# Altium PCB PCB1.PcbDoc
Units mm, origin at the board's own origin, x right, y up, seen from the top; angles counter-clockwise.
Board outline 58 x 72 mm, 2 copper layers (Top Layer, Bottom Layer); 27 components, 29 nets, 134 pads, 22 vias.
Unrouted connection lines stored in the file: 4.
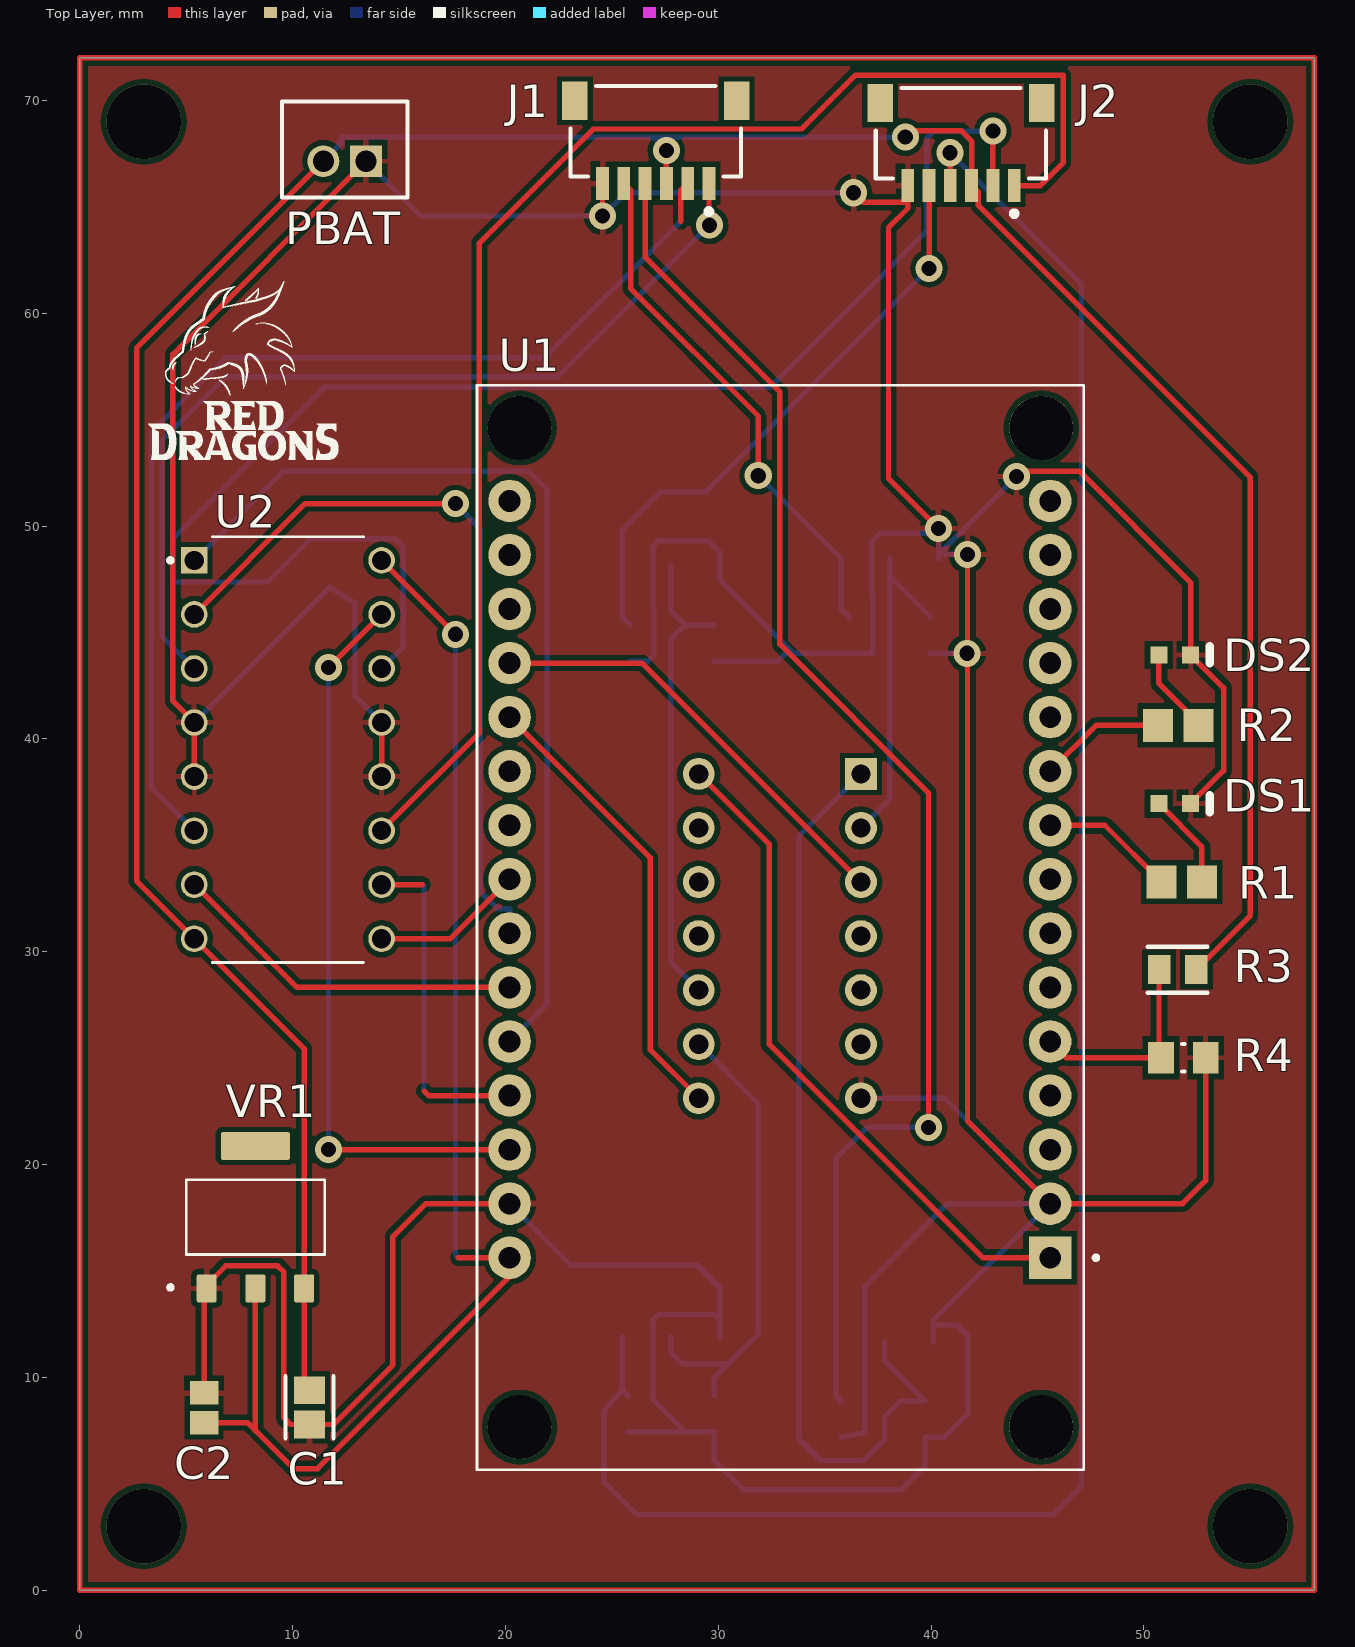
[diagram p0: Top Layer view]
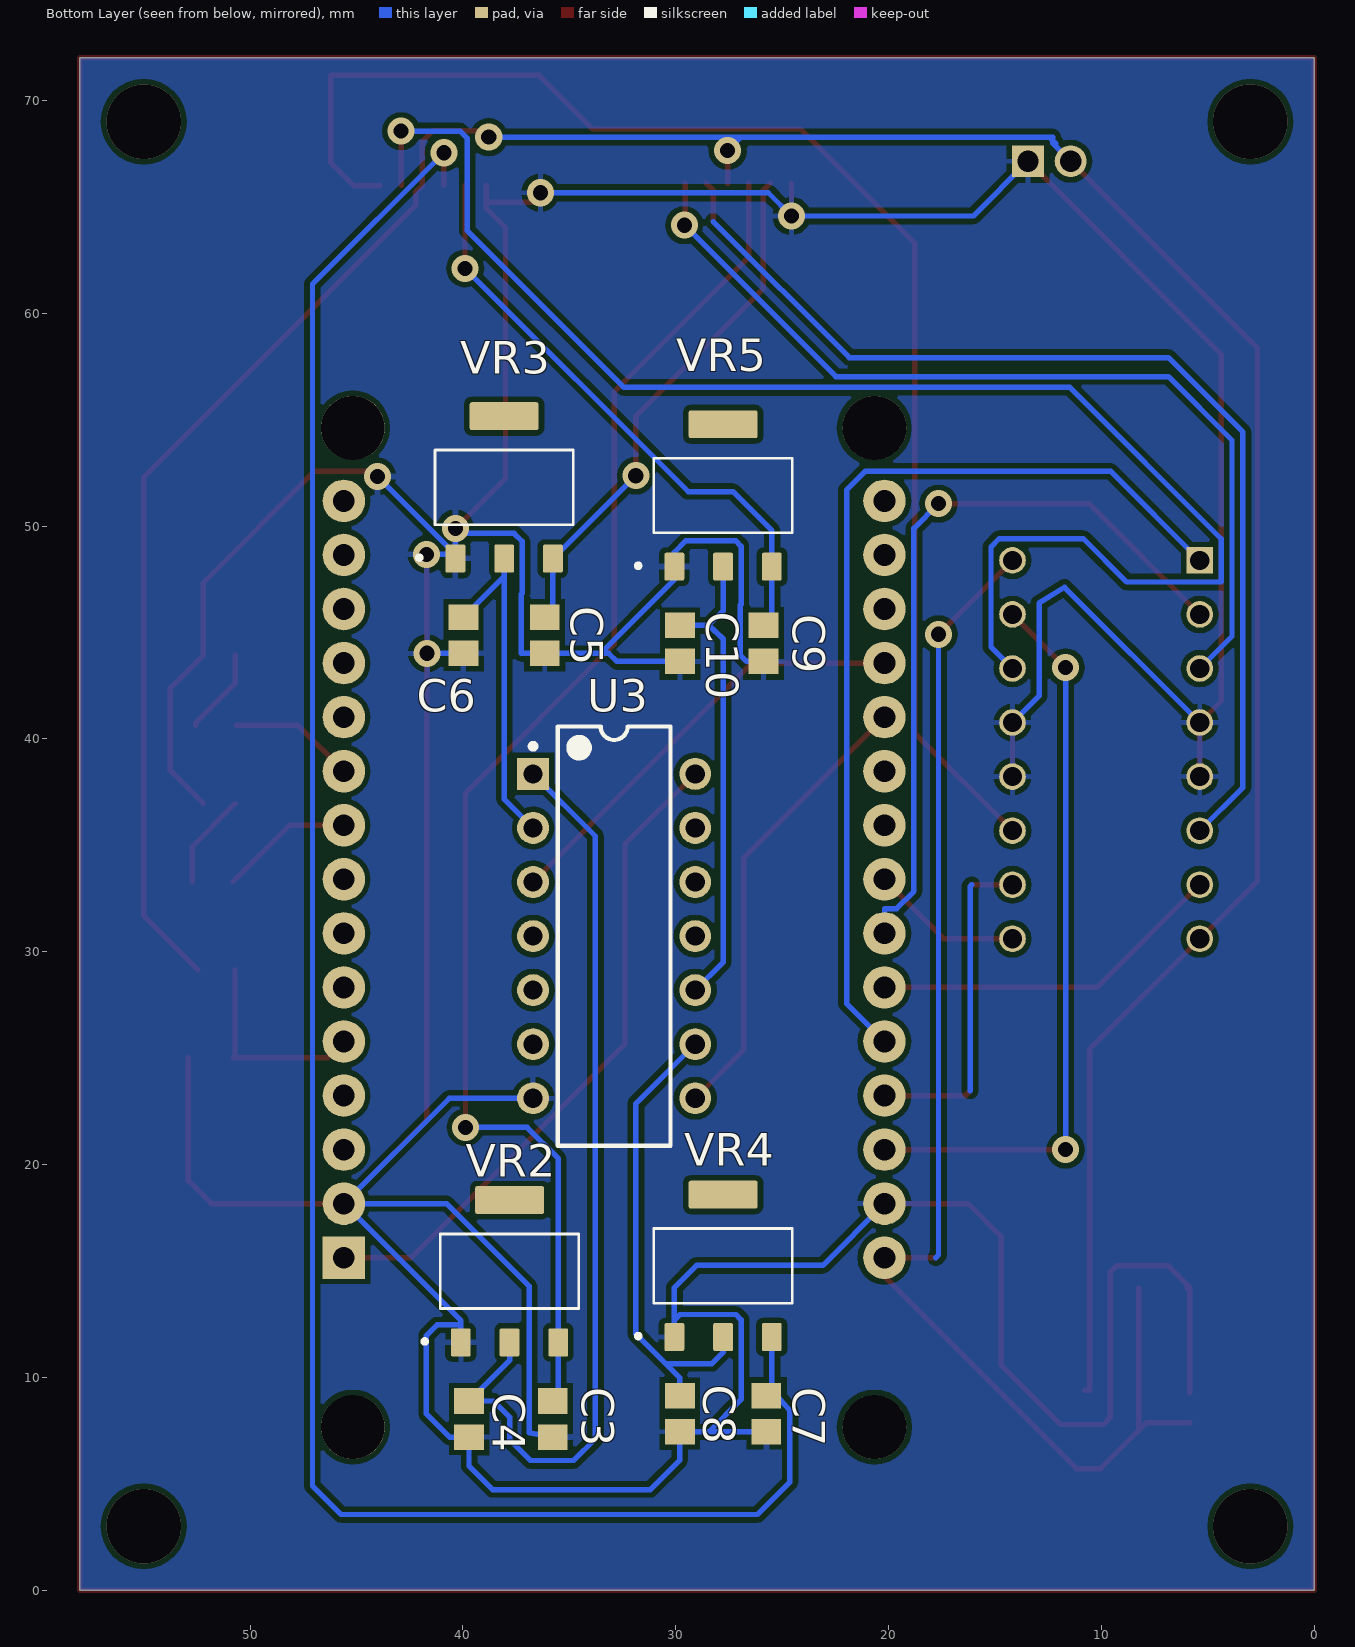
[diagram p1: Bottom Layer view, seen from below]
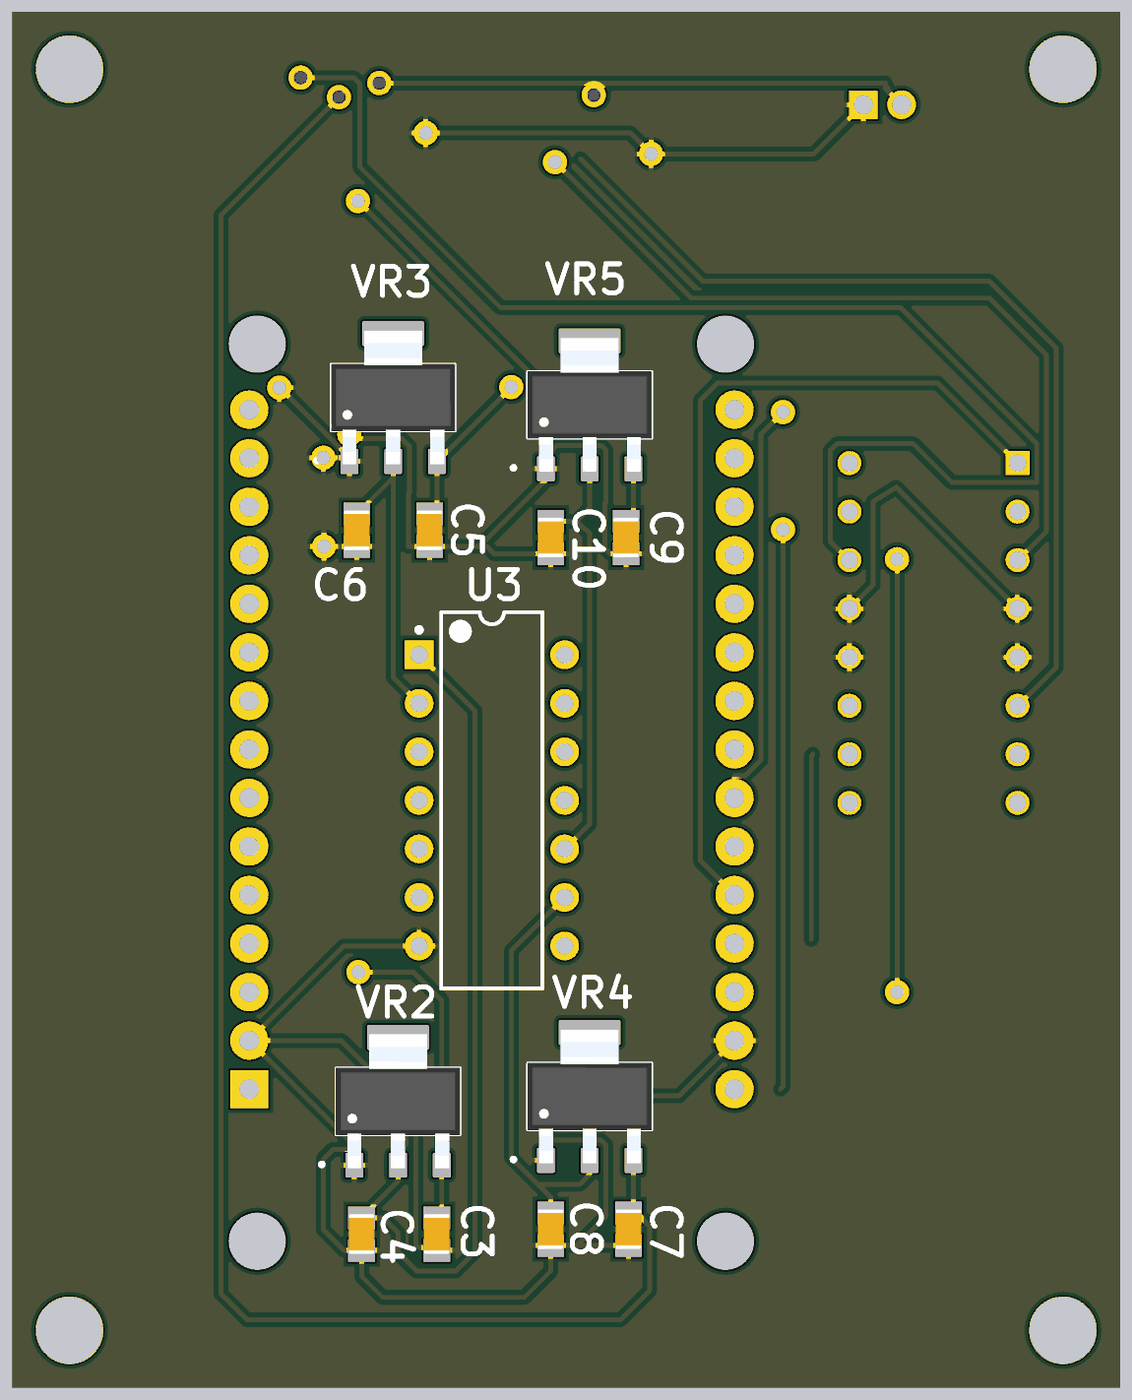
[diagram p2: 3D render of the assembled board from below, using the file's embedded part models]

## Layer stack, top to bottom
Top Solder: solder mask 0.0102, Solder Resist, Dk 3.5
Top Layer: signal copper 0.0356
Dielectric 1: dielectric 0.32, FR-4, Dk 4.8
Bottom Layer: signal copper 0.0356
Bottom Solder: solder mask 0.0102, Solder Resist, Dk 3.5

## Board outline
0,0 0,72 58,72 58,0

## Design rules (kind name [scope] priority, off if disabled: settings)
Clearance [All] p1: gap=0.254 ignorepadtopadclearanceinfootprint=FALSE except(0: Arc-Hole Track-Hole SMDPad-Hole THPad-Hole Via-Hole Fill-Hole Poly-Hole Region-Hole Text-Hole)
PolygonConnect [All] p1: connectstyle=Relief reliefconductorwidth=0.254 reliefentries=4 polygonreliefangle="90 Angle" airgapwidth=0.254
RoomDefinition Energia [InComponentClass('Energia')] p1: confinementstyle=ConfineIn formatcopy=TRUE lockcomponents=FALSE outline 69.596,0.172 127.596,0.172 127.596,72.054 69.596,72.054
RoutingVias [All] p1: holewidth=0.711 width=1.27 viastyle="Through Hole" minholewidth=0.711 minwidth=1.27 maxholewidth=0.711 maxwidth=1.27
SolderMaskExpansion [All] p1: expansion=0.102 istentingtop=FALSE
Width [All] p1: maxlimit=0.254 minlimit=0.254 preferedwidth=0.254
30 further rules are at their usual default settings.

## Components (designator, comment, footprint, x,y, rotation, side; value= is the part's Value field where it differs from the comment)
C1 "330nF" FP-0805-L_2_01_0_2-W_1_25-IPC_B 10.795,8.592 r270 top
C2 "100nF" CAPC2013X140X50LL20T25 5.842,8.571 r270 top
C3 "Capacitor 10 uF +/- 10% 16 V 0805" CAPC2013X135X45NL10T25 35.775,8.04 r270 bottom value=10µF
C4 "Capacitor 10 uF +/- 10% 16 V 0805" CAPC2013X135X45NL10T25 39.712,8.04 r270 bottom value=10µF
C5 "Capacitor 10 uF +/- 10% 16 V 0805" CAPC2013X135X45NL10T25 36.156,44.87 r270 bottom value=10µF
C6 "Capacitor 10 uF +/- 10% 16 V 0805" CAPC2013X135X45NL10T25 39.966,44.87 r270 bottom value=10µF
C7 "Capacitor 10 uF +/- 10% 16 V 0805" CAPC2013X135X45NL10T25 25.742,8.294 r270 bottom value=10µF
C8 "Capacitor 10 uF +/- 10% 16 V 0805" CAPC2013X135X45NL10T25 29.806,8.294 r270 bottom value=10µF
C9 "Capacitor 10 uF +/- 10% 16 V 0805" CAPC2013X135X45NL10T25 25.869,44.489 r270 bottom value=10µF
C10 "Capacitor 10 uF +/- 10% 16 V 0805" CAPC2013X135X45NL10T25 29.806,44.489 r270 bottom value=10µF
DS1 "LTST-C190KFKT" LTST-C190KFKT_V 51.447,36.957 r0 top
DS2 "LTST-C190KFKT" LTST-C190KFKT_V 51.447,43.942 r0 top
J1 "JST-SH-6Pin" JST-SM06B-SRSS-TB_V 27.061,68.552 r180 top
J2 "JST-SH-6Pin" JST-SM06B-SRSS-TB_V 41.402,68.453 r180 top
PBAT "JST PH 2-PIN" JST-B2B-PH-K-S_V 12.446,67.691 r180 top
R1 "ERA6AEB101V" RESC2013X60X40ML20T25 51.774,33.274 r180 top
R2 "ERA6AEB101V" RESC2013X60X40ML20T25 51.608,40.635 r180 top
R3 "22k" FP-CR0805-IPC_B 51.585,29.155 r0 top
R4 "Resistor 10k +/-1% 0805 125 mW" RESC2013X50X35ML15T15 51.85,25.019 r180 top value=10k
U1 "ESP32-DEVKIT-V1" MODULE_ESP32_DEVKIT_V1 32.893,31.136 r180 top
U2 "L293D" DIP880W50P254L2000H510Q16 9.779,39.497 r0 top
U3 "SN74HC86N" N0014A 32.893,30.734 r180 bottom
VR1 "AMS1117-5.0" SOT229P700X180-4N 8.25,17.526 r0 top
VR2 "AMS1117-3.3" SOT229P700X180-4N 37.807,14.986 r180 bottom
VR3 "AMS1117-3.3" SOT229P700X180-4N 38.061,51.816 r180 bottom
VR4 "AMS1117-3.3" SOT229P700X180-4N 27.774,15.24 r180 bottom
VR5 "AMS1117-3.3" SOT229P700X180-4N 27.774,51.435 r180 bottom

## Footprints (in the part's own frame and the unit in brackets; to place one, negate y for a bottom-side part, rotate by r counter-clockwise, add the part's x,y. Pads: shape width x height; smd on the part's side, far side on the other; paste and mask are expansions set on the pad)
CAPC2013X135X45NL10T25 [mm] "Chip Capacitor, 2-Leads, Body 2.10x1.35mm, IPC Medium Density"
  rect 1.2x1.4 smd: 1(-0.85,0) 2(0.85,0)
  body extent -1.05,-0.67 1.05,0.67, height 1.35
CAPC2013X140X50LL20T25 [mm] "Chip Capacitor, 2-Leads, Body 2.00x1.25mm, IPC High Density"
  rect 1.1x1.35 smd: 1(-0.7,0) 2(0.7,0)
  body extent -1.1,-0.72 1.1,0.72, height 1.4
DIP880W50P254L2000H510Q16 [mm]
  rect 1.25x1.25 hole 0.9: 1(-4.4,8.89)
  round 1.25 hole 0.9: 2(-4.4,6.35) 3(-4.4,3.81) 4(-4.4,1.27) 5(-4.4,-1.27) 6(-4.4,-3.81) 7(-4.4,-6.35) 8(-4.4,-8.89) 9(4.4,-8.89) 10(4.4,-6.35) 11(4.4,-3.81) 12(4.4,-1.27) 13(4.4,1.27) 14(4.4,3.81) 15(4.4,6.35) 16(4.4,8.89)
  silkscreen extent -5.62,-10 3.55,10
FP-0805-L_2_01_0_2-W_1_25-IPC_B [mm]
  rect 1.305x1.456 smd paste+0 mask+0: 1(-0.806,0) 2(0.806,0)
  silkscreen extent -1.46,-1.13 1.46,1.13, body extent -1,-0.63 1,0.63, height 1.4
FP-CR0805-IPC_B [mm]
  rect 1.058x1.362 smd paste+0 mask+0: 1(-0.877,0) 2(0.877,0)
  silkscreen extent -1.41,-1.08 1.41,1.08, body extent -1.66,-0.93 1.66,0.93, height 0.25
JST-B2B-PH-K-S_V [mm] "Connector, 2-Leads, Body 5.9x4.5mm, Pitch 2mm"
  rect 1.5x1.5 hole 1: 1(-1,0.55)
  round 1.5 hole 1: 2(1,0.55)
  silkscreen extent -2.95,-2.25 2.95,2.25, body extent -2.95,-2.25 2.95,2.25, height 6
JST-SM06B-SRSS-TB_V [mm] "SMD, 6-Leads, Body 8x4.25mm, Pitch 1mm"
  rect 0.6x1.55 smd: 1(-2.5,2.45) 2(-1.5,2.45) 3(-0.5,2.45) 4(0.5,2.45) 5(1.5,2.45) 6(2.5,2.45)
  rect 1.2x1.8 smd: MP1(-3.8,-1.425) MP2(3.8,-1.425)
  silkscreen extent -4,-2.13 4,3.9, body extent -4,-2.12 4,2.83, height 2.96
LTST-C190KFKT_V [mm] "SMD, 2-Leads, Body 1.6x0.8mm"
  rect 0.8x0.8 smd: 1(-0.75,0) 2(0.75,0)
  silkscreen extent 1.65,-0.4 1.65,0.4, body extent -0.8,-0.4 0.8,0.4, height 0.9
MODULE_ESP32_DEVKIT_V1 [mm]
  rect 2x2 hole 1.02: 1(-12.7,15.515)
  round 2 hole 1.02: 2(-12.7,12.975) 3(-12.7,10.435) 4(-12.7,7.895) 5(-12.7,5.355) 6(-12.7,2.815) 7(-12.7,0.275) 8(-12.7,-2.265) 9(-12.7,-4.805) 10(-12.7,-7.345) 11(-12.7,-9.885) 12(-12.7,-12.425) 13(-12.7,-14.965) 14(-12.7,-17.505) 15(-12.7,-20.045) 16(12.7,-20.045) 17(12.7,-17.505) 18(12.7,-14.965) 19(12.7,-12.425) 20(12.7,-9.885) 21(12.7,-7.345) 22(12.7,-4.805) 23(12.7,-2.265) 24(12.7,0.275) 25(12.7,2.815) 26(12.7,5.355) 27(12.7,7.895) 28(12.7,10.435) 29(12.7,12.975) 30(12.7,15.515)
  round 3 hole 3 unplated: ""(-12.28,23.475) ""(-12.28,-23.475) ""(12.23,23.475) ""(12.23,-23.475)
  silkscreen extent -14.95,-25.48 14.23,25.48
N0014A [mm] "DIP, 14-Leads, Body 19.7x6.6mm, Pitch 2.54mm"
  rect 1.5x1.5 hole 0.9: 1(-3.81,7.62)
  round 1.5 hole 0.9: 2(-3.81,5.08) 3(-3.81,2.54) 4(-3.81,0) 5(-3.81,-2.54) 6(-3.81,-5.08) 7(-3.81,-7.62) 8(3.81,-7.62) 9(3.81,-5.08) 10(3.81,-2.54) 11(3.81,0) 12(3.81,2.54) 13(3.81,5.08) 14(3.81,7.62)
  silkscreen extent -3.94,-9.85 2.65,9.85, body extent -3.95,-9.85 3.95,9.85, height 5.08
RESC2013X50X35ML15T15 [mm] "Chip Resistor, 2-Leads, Body 2.2x1.4mm, IPC Low Density"
  rect 1.2x1.5 smd: 1(-1.05,0) 2(1.05,0)
  silkscreen extent -0.05,-0.65 0.05,0.65, body extent -1.1,-0.7 1.1,0.7, height 0.5
RESC2013X60X40ML20T25 [mm] "Chip Resistor, 2-Leads, Body 2.00x1.25mm, IPC Low Density"
  rect 1.4x1.55 smd: 1(-0.95,0) 2(0.95,0)
  body extent -1.1,-0.72 1.1,0.72, height 0.6
SOT229P700X180-4N [mm]
  rrect15% 0.93x1.31 smd: 1(-2.29,-3.345) 2(0,-3.345) 3(2.29,-3.345)
  rrect15% 3.24x1.31 smd: 4(0,3.345)
  silkscreen extent -4.09,-3.4 3.25,1.75, body extent -3.25,-3.5 3.25,3.5, height 1.8

## Part data
C1: library part CMP-2007-04657-2, "General Purpose Ceramic Capacitor, 0805, 330nF, 10%, X7R, 15%, 16V", Case Code (Imperial)=0805, Case Code (Metric)=2012, Dielectric=X7R, Insulation Resistance=100GR, Max Operating Temperature=125°C, Min Operating Temperature=-55°C, Package Quantity=1, Tolerance=10%, Voltage=16V, Capacitance=330nF, Case/Package=0805, Construction=Flat, Contact Plating=Tin, Depth=1.25mm, Dissipation Factor=3.5%, Height=1.4mm, Lead Free="Lead Free", Length=2.01mm, Mount="Surface Mount", Number of Pins=2, Packaging="Tape and Reel", Radiation Hardening=No, REACH SVHC="No SVHC", RoHS Compliant=Yes, Series=-, Size=1.4mm, Termination=SMD/SMT, Thickness=0.055inch, Voltage Rating=16V, Voltage Rating (DC)=16V, Width=1.25mm
C2: library part CMP-2007-04746-1, Manufacturer="AVX Interconnect / Elco", Part Number=08055C104K4T4A
C3 C4 C5 C6 C7 C8 C9 C10: library part CMP-001-00015-6, "Chip Capacitor, 10 uF, +/- 10%, 16 V, 0805 (2012 Metric)", Capacitor Type=Ceramic, Case/Package=0805, Max Operating Temperature=85°C, Min Operating Temperature=-55°C, Tolerance=10%, Voltage Rating=16V, Mounting Technology=SM, Pins=2, RoHS Compliant=True
DS1 DS2: library part CMP-007-00023-2, "LED Uni-Color Orange, 75 mW, 30 mA, -35 to 85 degC, 2-Pin SMD, RoHS, Tape and Reel", Case/Package=0603, Colour=Orange, Forward Current=20mA, Forward Voltage=2V, Manufacturer=Lite-On, Max Operating Temperature=85°C, Min Operating Temperature=-55°C, Package Description="2-Pin Surface Mount Device, Body 1.6 x 0.8 mm", Package Quantity=3000, Package Reference=C190KFKT, Power=75mW, Datasheet URL=http://optoelectronics.liteon.com/upload/download/DS-22-99-0186/S_110_LTST-C190KFKT.pdf, Datasheet Version="Rev. I, 09/2011", Illumination Colour=Orange, Lens Style=Diffused, Luminous Intensity=90mcd, Manufacturer URL=http://www.us.liteon.com/, Mounting Technology=SM, Nominal Vf=2V, Packaging=TapeandReel, Pins=2, RoHS Compliant=True, Viewing Angle=130degrees
J1 J2: library part CMP-2000-07080-1, "Male Header, Pitch 1 mm, 1 x 6 Position, Height 2.95 mm, -25 to 85 degC, RoHS, Tape and Reel", Manufacturer=JST, Package Description="Male Header, Pitch 1 mm, 1 X 6 Position, Height 2.9 mm", Package Reference=SM06B-SRSS-TB, Datasheet URL=https://datasheet.ciiva.com/26894/getdatasheetpartid-708885-26894671.pdf, Datasheet Version=11/2010, Manufacturer URL=http://www.jst.com/home2.html, Mounting Technology=SurfaceMount, No of Positions=6, Pitch=1mm, Style/Orientation=RightAngleHeader/Plug, Termination=Solder, Type=ShroudedHeader
PBAT: library part CMP-2000-05162-1, "Male Header, Pitch 2 mm, 1 x 2 Position, Height 6 mm, Tail Length 3.4 mm, -25 to 85 degC, RoHS, Bulk", Manufacturer=JST, Datasheet URL=http://datasheet.octopart.com/B2B-PH-K-S%28LF%29%28SN%29-JST-datasheet-8324864.pdf, Datasheet Version=Nov-08, Manufacturer URL=http://www.jst.com/home2.html, No of Positions=2, Pitch=2mm, Style/Orientation=StraightHeader/Plug, Termination=Crimp, Type=ShroudedHeader
R1 R2: library part CMP-2001-00580-1, Manufacturer=Panasonic, Part Number=ERA6AEB101V
R3: library part CMP-07231-001007-1, "Thick Film Chip Resistors 0805 22kΩ 0.125W 5% 200ppm/°C", Case Code (Imperial)=0805, Case Code (Metric)=2012, Max Operating Temperature=155°C, Min Operating Temperature=-55°C, Package Quantity=5000, Power Rating=125mW, Resistance=22kR, Temperature Coefficient=200ppm/°C, Tolerance=5%, Voltage Rating=150V, Case/Package=0805, Composition="Thick Film", Contact Plating=Tin, Depth=1.25mm, Height=0.5mm, Length=2mm, Military Standard=Not, Mount="Surface Mount", Packaging="Tape and Reel", Radiation Hardening=No, Termination=SMD/SMT, Thickness=508um, Width=1.25mm
R4: library part CMP-009-00018-5, "Chip Resistor, 10 KOhm, +/- 1%, 125 mW, -55 to 155 degC, 0805 (2012 Metric)", Case/Package=0805, Max Operating Temperature=155°C, Min Operating Temperature=-55°C, Power=125mW, Tolerance=1%, Voltage Rating=150V, Mounting Technology=SM, Pins=2, RoHS Compliant=True
U1: "Dual core, Wi-Fi: 2.4 GHz up to 150 Mbits/s,BLE (Bluetooth Low Energy) and legacy Bluetooth, 32 bits, Up to 240 MHz", Package=None, Availability=Unavailable, MF="{'manufacturer': u'Do it'}", MP=ESP32-DEVKIT-V1, Price=None
U2: "4-Channel Motor Driver 24V 16-Pin Power PDIP Tube", Package=None, Availability=Unavailable, MF="{'manufacturer': u'STMicroelectronics'}", MP=L293D, Price=None
U3: library part CMP-024-00000-1, "4-ch, 2-input, 2-V to 6-V XOR (exclusive OR) gates 14-PDIP -40 to 85"
VR1: Package=None, Availability=Unavailable, MF="{'manufacturer': u'ams'}", MP=AMS1117-5.0, Price=None
VR2 VR3 VR4 VR5: "Sot223/Pkg 1-Amp 3.3-Volt Low Drop Out Voltage Regulatator", Package=None, Availability=Unavailable, MF="{'manufacturer': u'Advanced Monolithic Systems'}", MP=AMS1117-3.3, Price=None

## Via types
v1: diameter 1.27, hole 0.711, Top Layer to Bottom Layer, 18 vias
v2: diameter 3.5/3.5 (per signal layer), hole 3.5, Top Layer to Bottom Layer, 4 vias

## Nets (pads, with @x,y where several pads share a name; then routed paths per layer and width w, separated by ;. In a path a pad name is that pad's centre, name@x,y a point inside that pad or via, vN(x,y) a via of type N, cw(c..) or ccw(c..) an arc to the next point about the centre after c; other vN are vias at no path point)
+3V: U1.1 U3.14 | length 31.4
  Top Layer w0.254: U3.14 32.385,35.052 32.385,25.654 42.418,15.621 U1.1
+3V3A1: C4.1 U3.1 VR2.2 | length 44.1
  Bottom Layer w0.254: U3.1 33.782,35.433 33.782,7.112 34.798,6.096 36.83,6.096 37.807,7.073 37.807,8.128 38.569,8.89 C4.1 37.807,10.795 VR2.2
+3V3A2: C8.1 U3.9 VR4.2 | length 22.2
  Bottom Layer w0.254: VR4.2 27.774,11.176 28.302,10.649 30.48,10.649 ; U3.9 31.877,22.86 31.877,12.046 30.48,10.649 ; C8.1 29.806,9.975 30.48,10.649
+3V3B1: C6.1 U3.2 VR3.2 | length 15.9
  Bottom Layer w0.254: U3.2 38.061,37.172 38.061,47.625 ; VR3.2 38.061,47.625 ; C6.1 38.061,47.625
+3V3B2: C10.1 U3.10 VR5.2 | length 22.4
  Bottom Layer w0.254: VR5.2 27.774,46.013 28.448,45.339 ; U3.10 27.774,29.503 27.774,44.704 28.448,45.339 ; C10.1 28.448,45.339
+5V: C2.2 U1.30 U2.16 VR1.2 | length 63.2
  Top Layer w0.254: C2.2 7.877,7.871 8.25,7.498 ; VR1.2 8.25,7.498 ; U2.16 v1(17.653,44.913) ; 17.78,15.621 U1.30 20.193,14.732 11.176,5.715 10.033,5.715 8.25,7.498
  Bottom Layer w0.254: v1(17.653,44.913) 17.653,15.748 17.78,15.621
EN1: U1.26 U2.1 | length 45.3
  Bottom Layer w0.254: U2.1 9.57,52.578 21.082,52.578 21.971,51.689 21.971,27.559 U1.26
EN2: U1.23 U2.9 | length 7.2
  Top Layer w0.254: U2.9 17.399,30.607 U1.23
GND: C1.2 C2.1 C3.2 C4.2 C5.2 C6.2 C7.2 C8.2 C9.2 C10.2 DS1.2 DS2.2 J1.6 J2.6 PBAT.1 R4.1 U1.2 U1.29 U2.4 U2.5 U2.12 U2.13 U3.7 VR1.1 VR2.1 VR3.1 VR4.1 VR5.1 | length 329.7
  Top Layer w0.254: U2.5 U2.4 4.369,41.777 4.369,58.064 PBAT.1 ; C2.1 5.842,14.181 5.842,14.224 VR1.1@5.879,14.261 ; VR1.1 VR1.1@5.879,14.261 ; U2.12 U2.13 ; U1.29 16.256,18.161 14.707,16.612 14.707,10.58 11.913,7.786 C1.2 9.906,7.786 9.587,8.105 9.587,14.949 9.296,15.24 6.858,15.24 VR1.1@5.879,14.261 ; v1(24.561,64.567) J1.6 ; v1(36.355,65.659) 36.801,65.214 38.902,65.214 ; J2.6 38.902,65.214 ; v1(40.351,49.888) 37.998,52.241 37.998,64.016 38.902,64.92 38.902,65.214 ; v1(41.681,44.02) v1@41.707,44.02 ; v1(41.707,48.666) v1@41.707,44.02 ; v1(44.018,52.333) 44.263,52.578 46.965,52.578 52.197,47.346 DS2.2 53.746,42.393 53.746,38.506 DS1.2 ; R4.1 52.9,19.245 51.816,18.161 U1.2 41.707,22.047 v1@41.707,44.02
  Bottom Layer w0.254: U2.4 11.729,47.117 12.929,46.38 12.929,42.017 U2.13 ; PBAT.1 16.02,64.567 v1(24.561,64.567) 25.653,65.659 v1(36.355,65.659) ; U1.29 23.089,15.265 29.023,15.265 30.064,14.224 30.064,12.7 ; C7.2 28.448,7.444 ; C9.2 26.672,43.639 26.975,43.942 26.975,46.279 26.924,46.33 26.924,49.047 27.178,49.301 29.531,49.301 30.064,48.768 VR5.1 30.064,47.484 33.528,44.02 ; C10.2 32.766,43.639 33.147,44.02 33.528,44.02 ; VR4.1 30.064,12.7 ; C3.2 36.881,7.393 36.881,14.275 40.767,18.161 U1.2 ; U3.7 40.64,23.114 U1.2 ; C6.2 v1(41.681,44.02) ; VR2.1 40.097,12.469 ; VR3.1 VR3.1@40.351,48.666 ; v1(40.351,49.888) v1@40.351,49.276 ; v1(41.707,48.666) VR3.1@40.351,48.666 ; v1(44.018,52.333) VR3.1@40.351,48.666 ; 28.448,7.444 C8.2 29.806,6.109 31.191,4.724 38.608,4.724 39.712,5.829 C4.2 40.627,7.19 41.718,8.28 41.718,11.969 41.217,12.469 40.097,12.469 ; 28.448,7.444 26.924,8.968 26.924,12.7 27.178,12.954 29.81,12.954 30.064,12.7 ; 33.528,44.02 C5.2 37.262,44.02 37.262,46.787 37.211,46.838 37.211,49.276 37.592,49.657 39.97,49.657 v1@40.351,49.276 ; 40.097,12.469 40.097,12.665 U1.2 ; VR3.1@40.351,48.666 v1@40.351,49.276
IN1: U1.24 U2.2 | length 36
  Top Layer w0.254: U2.2 10.586,51.054 v1(17.653,51.054)
  Bottom Layer w0.254: v1(17.653,51.054) 18.812,49.895 18.812,32.829 19.621,32.02 20.193,32.02 U1.24
IN2: U1.25 U2.7 | length 16.8
  Top Layer w0.254: U2.7 10.205,28.321 U1.25
IN3: U1.27 U2.10 | length 15.8
  Top Layer w0.254: U2.10 16.093,33.147 ; 16.17,23.454 16.383,23.241 U1.27
  Bottom Layer w0.254: 16.093,33.147 16.17,33.07 16.17,23.454
IN4: U1.28 U2.15 | length 34.7
  Top Layer w0.254: v1(11.684,20.701) U1.28 ; v1(11.684,43.352) U2.15
  Bottom Layer w0.254: v1(11.684,20.701) v1(11.684,43.352)
LED_COM: R2.2 U1.10 | length 6
  Top Layer w0.254: U1.10 47.747,40.635 R2.2
NetC3_1: C3.1 J1.4 VR2.3 | length 66.3
  Top Layer w0.254: J1.4 26.561,62.633 32.893,56.301 32.893,44.45 39.878,37.465 v1(39.878,21.745)
  Bottom Layer w0.254: C3.1 35.517,9.148 VR2.3 35.517,20.277 36.985,21.745 v1(39.878,21.745)
NetC5_1: C5.1 J1.5 VR3.3 | length 24.8
  Top Layer w0.254: J1.5 25.88,65.783 25.88,61.159 31.877,55.162 v1(31.877,52.365)
  Bottom Layer w0.254: v1(31.877,52.365) VR3.3 35.771,46.105 C5.1
NetC7_1: C7.1 J2.4 VR4.3 | length 97.8
  Top Layer w0.254: v1(40.894,67.539) 40.902,67.531 J2.4
  Bottom Layer w0.254: VR4.3 C7.1@25.484,9.402 ; C7.1 C7.1@25.484,9.402 ; v1(40.894,67.539) 47.066,61.366 47.066,4.902 45.72,3.556 26.162,3.556 24.638,5.08 24.638,8.433 25.468,9.383 C7.1@25.484,9.402
NetC9_1: C9.1 J2.5 VR5.3 | length 28
  Top Layer w0.254: v1(39.902,62.103) J2.5
  Bottom Layer w0.254: C9.1 25.484,45.724 VR5.3 25.484,49.784 27.313,51.613 29.412,51.613 v1(39.902,62.103)
NetDS1_1: DS1.1 R1.1 | length 4.5
  Top Layer w0.254: DS1.1 52.724,34.93 R1.1
NetDS2_1: DS2.1 R2.1 | length 4.1
  Top Layer w0.254: DS2.1 50.697,42.611 52.558,40.749 R2.1
NetJ1_1: J1.1 U2.3 | length 43.2
  Top Layer w0.254: J1.1 29.561,64.165 v1(29.591,64.135)
  Bottom Layer w0.254: U2.3 3.865,44.821 3.865,54.03 6.858,57.023 22.479,57.023 v1(29.591,64.135)
NetJ1_2: J1.2 U2.6 | length 50.5
  Top Layer w0.254: 28.242,64.31 28.242,65.783 J1.2
  Bottom Layer w0.254: U2.6 3.357,37.709 3.357,54.411 6.858,57.912 21.844,57.912 28.242,64.31
NetJ2_1: J2.1 U2.11 | length 67.1
  Top Layer w0.254: U2.11 18.771,40.279 18.771,63.297 24.13,68.656 33.909,68.656 36.424,71.171 46.203,71.171 46.203,67.056 45.136,65.989 43.902,65.989 J2.1
NetJ2_2: J2.2 U2.14 | length 71.5
  Top Layer w0.254: J2.2 v1(42.902,68.555)
  Bottom Layer w0.254: U2.14 15.189,44.317 15.189,49.022 14.808,49.403 10.846,49.403 8.814,47.371 4.373,47.371 4.373,49.403 11.485,56.515 32.436,56.515 39.802,63.881 39.802,68.224 40.132,68.555 v1(42.902,68.555)
NetR1_2: R1.2 U1.9 | length 6.3
  Top Layer w0.254: U1.9 48.157,35.941 R1.2
NetR3_1: R3.1 R4.2 U1.5 | length 9.7
  Top Layer w0.254: U1.5 46.355,25.019 R4.2 50.707,25.112 R3.1
NetU1_19: U1.19 U3.3 | length 20.8
  Top Layer w0.254: U1.19 26.416,43.561 U3.3
NetU1_20: U1.20 U3.8 | length 21.6
  Top Layer w0.254: U1.20 26.797,34.417 26.797,25.4 U3.8
VBAT: C1.1 J1.3 J2.3 PBAT.2 R3.2 U2.8 VR1.3 | length 144.7
  Top Layer w0.254: C1.1 10.54,9.398 VR1.3 10.54,25.446 U2.8 2.667,33.319 2.667,58.362 PBAT.2 ; J1.3 v1(27.561,67.64) ; v1(38.786,68.275) 39.091,68.58 41.402,68.58 41.91,68.072 41.91,66.243 41.902,66.243 J2.3 42.221,65.684 42.221,65.07 54.991,52.3 54.991,31.684 R3.2
  Bottom Layer w0.254: PBAT.2 12.141,67.836 ; v1(27.561,67.64) 26.926,68.275 ; v1(38.786,68.275) 26.926,68.275 ; 12.141,67.836 12.294,67.989 12.294,68.123 ; 12.141,67.836 12.141,67.97 12.294,68.123 ; 12.294,68.123 12.294,68.275 12.446,68.275 ; 12.294,68.123 12.446,68.275 ; 12.446,68.275 26.926,68.275
pads on no net: J1.MP1 J1.MP2 J2.MP1 J2.MP2 U1. U1.3 U1.4 U1.6 U1.7 U1.8 U1.11 U1.12 U1.13 U1.14 U1.15 U1.16 U1.17 U1.18 U1.21 U1.22 U3.4 U3.5 U3.6 U3.11 U3.12 U3.13 VR1.4 VR2.4 VR3.4 VR4.4 VR5.4
copper on no net: | length 260
  Top Layer w0.254: 0,0 58,0 58,72 0,72 0,0
  other v2: 3,3 55,3 3,69 55,69

## Polygon pours and split planes (outlines as drawn)
GND on Top Layer "GND_L01_P000" (solid, pour order 0): 0,0 0,72 58,72 58,0
GND on Bottom Layer "GND_L02_P001" (solid, pour order 1): 0,0 0,72 58,72 58,0

## Silkscreen, mask and mechanical layers (free items; w line width, h text height)
Top Overlay:
  drawing of 22 lines, arcs and shapes, not listed